# Altium PCB nrf52840_bma250e.PcbDoc
Units mil, origin at the board's own origin, x right, y up, seen from the top; angles counter-clockwise.
Board outline 1106.39 x 1279.63 mil, 2 copper layers (Top Layer, Bottom Layer), stack 12.8 mil thick; 21 components, 59 nets, 119 pads, 88 vias.
Unrouted connection lines stored in the file: 1.
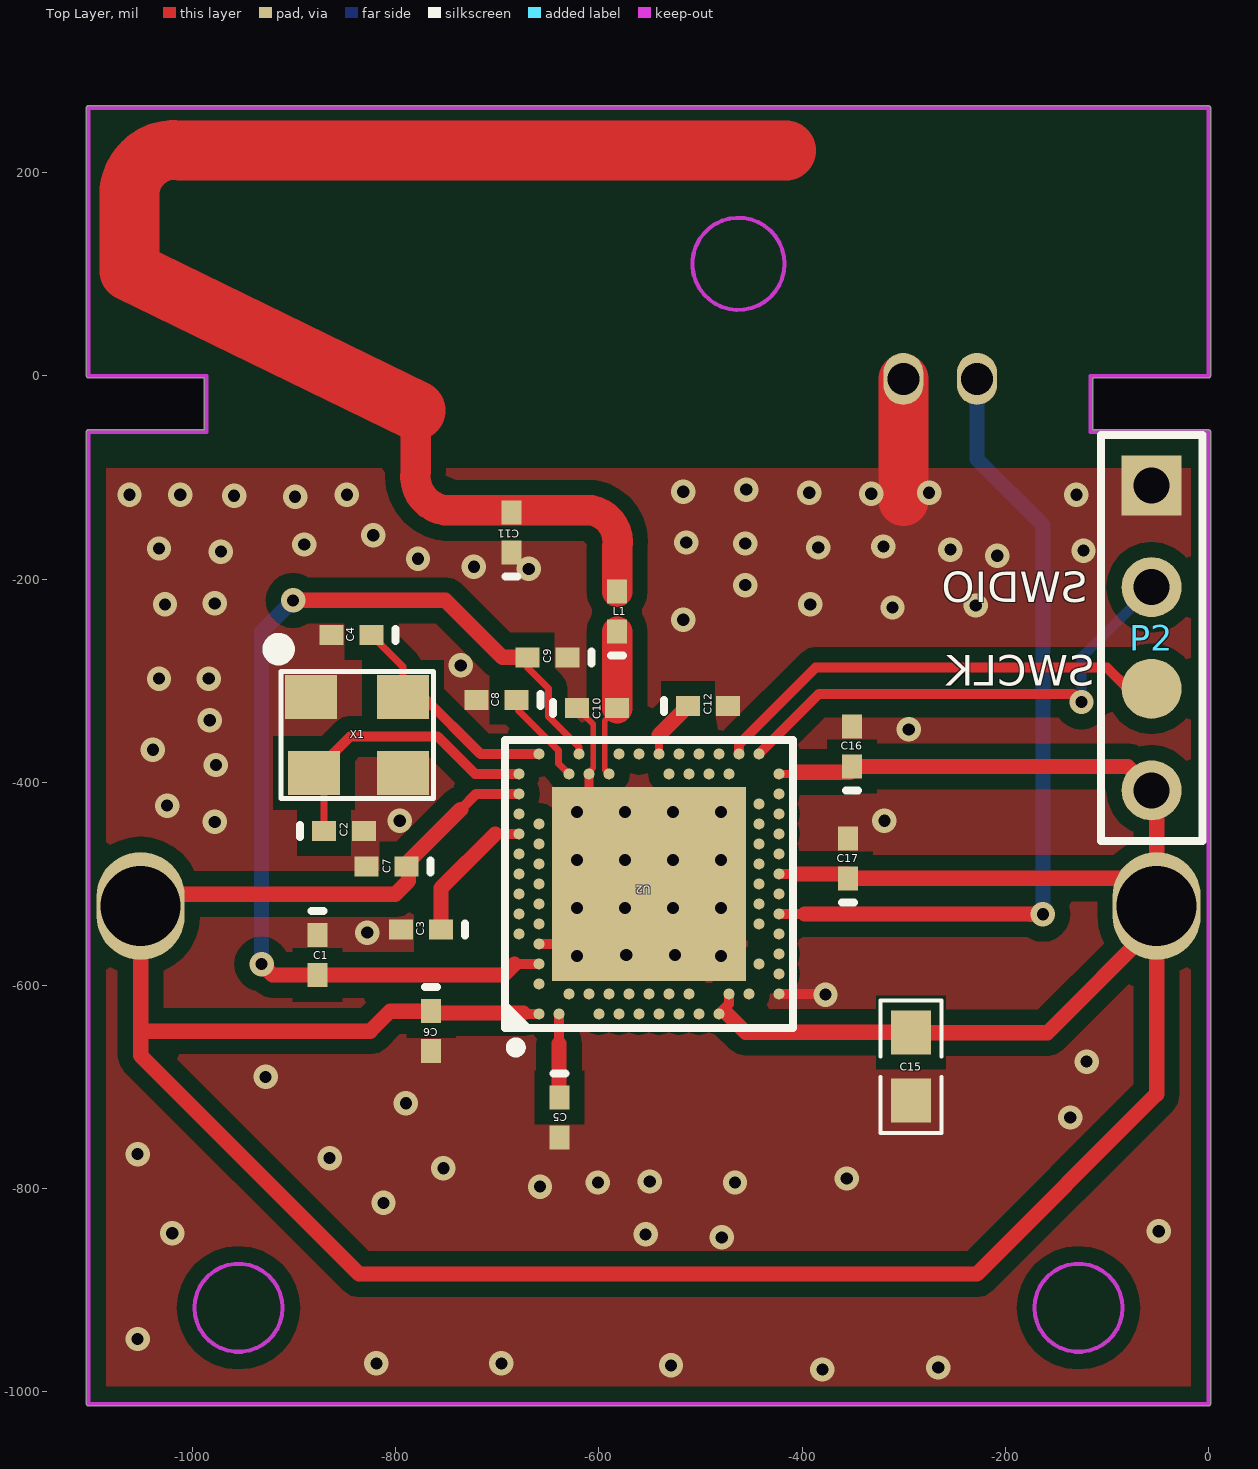
[diagram p0: Top Layer view]
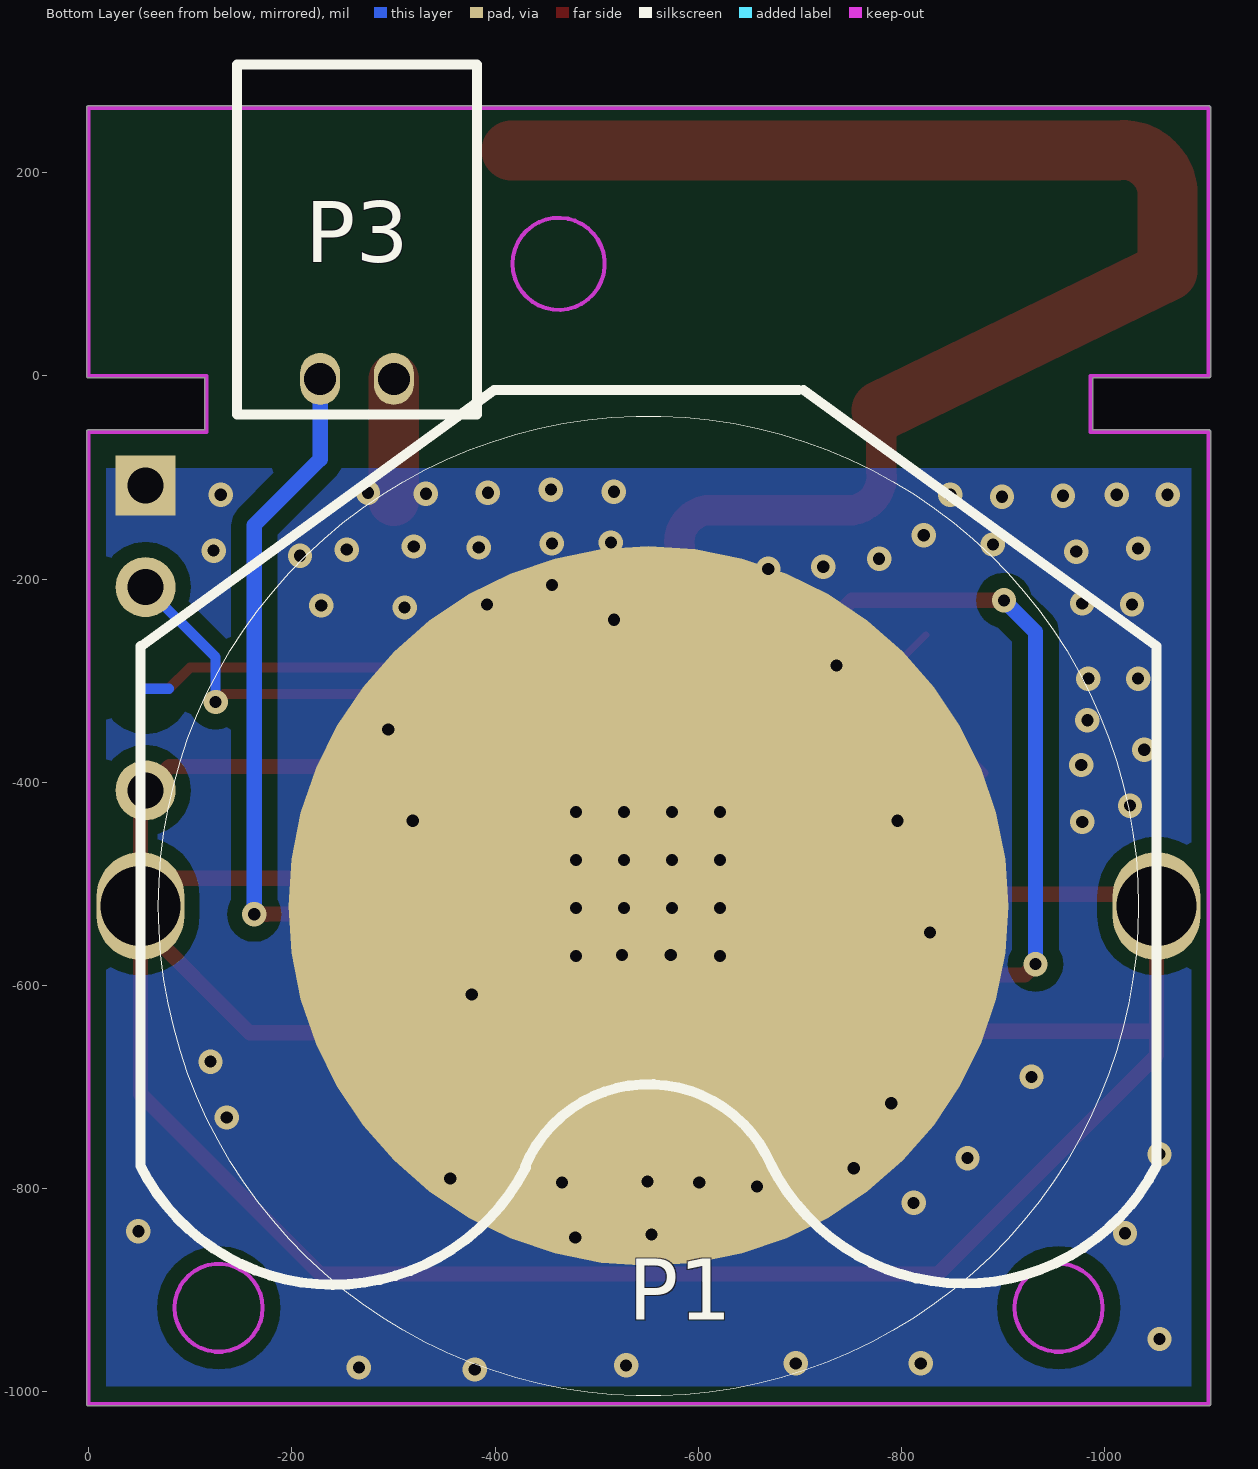
[diagram p1: Bottom Layer view, seen from below]

## Layer stack, top to bottom
Top Layer: signal copper 1.4
Dielectric: core 10, FR-4, Dk 4.2
Bottom Layer: signal copper 1.4

## Board outline
-1104.38,-1011.82 ccw(c-1102.36,-1011.82) -1102.36,-1013.84 0,-1013.84 ccw(c0,-1011.82) 2.02,-1011.82 2.02,-55.12 ccw(c0,-55.12) 0,-53.11 -114.12,-53.11 -114.12,-2.01 0,-2.01 ccw(c0,0) 2.02,0 2.02,263.78 ccw(c0,263.78) 0,265.8 -1102.36,265.8 ccw(c-1102.36,263.78) -1104.38,263.78 -1104.38,0 ccw(c-1102.36,0) -1102.36,-2.01 -988.23,-2.01 -988.23,-53.11 -1102.36,-53.11 ccw(c-1102.36,-55.12) -1104.38,-55.12

## Design rules (kind name [scope] priority, off if disabled: settings)
Clearance [All] p1: gap=5
ComponentClearance [All] p1 off: gap=10 collisioncheckmode=3 verticalgap=10 showdistances=FALSE
Height [All] p1 off: minheight=0 maxheight=1000 prefheight=500
MinimumSolderMaskSliver [All] p1 off: minsoldermaskwidth=10
NetAntennae [All] p1 off: netantennaetolerance=0
PlaneConnect [All] p1: planeconnectstyle=Direct reliefexpansion=20 reliefentries=4 reliefconductorwidth=10 reliefairgap=10
PolygonConnect [All] p1: connectstyle=Direct reliefconductorwidth=10 reliefentries=4 polygonreliefangle="90 Angle"
RoutingVias [All] p1: holewidth=28 width=50 viastyle="Through Hole" minholewidth=28 minwidth=50 maxholewidth=28 maxwidth=50
SilkToSilkClearance [All] p1 off: silktosilkclearance=10
SilkscreenOverComponentPads SilkToSolderMaskClearance [IsPad] p1 off: minsilkscreentomaskgap=10
SolderMaskExpansion [All] p1: expansion=4
Width [All] p1: maxlimit=100 minlimit=1 preferedwidth=10 minimp=50.000000 maximp=50.000000 favimp=50.000000
21 further rules are at their usual default settings.

## Components (designator, comment, footprint, x,y, rotation, side; value= is the part's Value field where it differs from the comment)
C1 "1.0μF" 0402-A -877,-570 r270 top
C2 "12pF" 0402-A -850.69,-448.06 r0 top
C3 "N.C." 0402-A -775,-545 r180 top
C4 "12pF" 0402-A -843.69,-255.06 r180 top
C5 "100nF" 0402-A -639,-730 r270 top
C6 "1.0μF" 0402-A -765,-645 r270 top
C7 "100nF" 0402-A -809,-482.82 r180 top
C8 "100pF" 0402-A -701,-318.82 r180 top
C9 "N.C." 0402-A -650.69,-277.06 r180 top
C10 "0.75pF" 0402-A -601.69,-327.06 r0 top
C11 "NC" 0402-A -686,-154 r90 top
C12 "820pF" 0402-A -492.69,-325.06 r0 top
C15 "4.7μF" 0603-1 -293,-680 r270 top
C16 "100nF" 0402-a -351,-364.82 r90 top
C17 "100nF" 0402-a -355,-474.82 r90 top
L1 "1nH" 0402-A -582,-232 r90 top
P1 "Header 3" bat -51,-521.82 r180 bottom
P2 "Header 4" HDR1X4 -56,-108 r270 top
P3 "Header 2" connect_2 -146,-38 r180 bottom
U2 "nRF52840-QIAA" AQFN50P700X700X85_HS-74N -550.69,-500.06 r90 top
X1 "32MHz" SMD3225 -792.69,-316.06 r180 top

## Footprints (in the part's own frame and the unit in brackets; to place one, negate y for a bottom-side part, rotate by r counter-clockwise, add the part's x,y. Pads: shape width x height; smd on the part's side, far side on the other; paste and mask are expansions set on the pad)
0402-A [mm] "Chip Inductor; Body 1 x 0.5 mm (LxW typ"
  rect 0.6x0.5 smd: 1(-0.5,0) 2(0.5,0)
  silkscreen extent -1.1,-0.15 -1.1,0.15
0402-a [mm] "Chip Inductor; Body 1 x 0.5 mm (LxW typ)"
  rect 0.6x0.5 smd: 1(-0.5,0) 2(0.5,0)
  silkscreen extent -1.1,-0.15 -1.1,0.15
0603-1 [mm]
  rect 1.1x1 smd: 1(-0.85,0) 2(0.85,0)
  silkscreen extent -1.65,-0.76 1.65,0.76, body extent -1.14,-0.38 1.14,0.38, height 1
AQFN50P700X700X85_HS-74N [mm]
  rect 4.85x4.85 smd mask+0.05: 74(0,0)
  round 0.275 smd paste+0.012 mask+0.05: A8(-1.25,3.25) A10(-0.75,3.25) A12(-0.25,3.25) A14(0.25,3.25) A16(0.75,3.25) A18(1.25,3.25) A20(1.75,3.25) A22(2.25,3.25) A23(2.75,3.25) AA24(3.25,-2.25) AB2(-2.75,-2.5) AC5(-2,-2.75) AC9(-1,-2.75) AC11(-0.5,-2.75) AC13(0,-2.75) AC15(0.5,-2.75) AC17(1,-2.75) AC19(1.5,-2.75) AC21(2,-2.75) AC24(3.25,-2.75) AD2(-2.75,-3.25) AD4(-2.25,-3.25) AD6(-1.75,-3.25) AD8(-1.25,-3.25) AD10(-0.75,-3.25) AD12(-0.25,-3.25) AD14(0.25,-3.25) AD16(0.75,-3.25) AD18(1.25,-3.25) AD20(1.75,-3.25) AD22(2.25,-3.25) AD23(2.75,-3.25) B1(-3.25,2.75) B3(-2.5,2.75) B5(-2,2.75) B7(-1.5,2.75) B9(-1,2.75) B11(-0.5,2.75) B13(0,2.75) B15(0.5,2.75) B17(1,2.75) B19(1.5,2.75) B24(3.25,2.75) C1(-3.25,2.25) D2(-2.75,2) D23(2.75,2) E24(3.25,1.75) F2(-2.75,1.5) F23(2.75,1.5) G1(-3.25,1.25) H2(-2.75,1) H23(2.75,1) J1(-3.25,0.75) J24(3.25,0.75) K2(-2.75,0.5) L1(-3.25,0.25) L24(3.25,0.25) M2(-2.75,0) N1(-3.25,-0.25) N24(3.25,-0.25) P2(-2.75,-0.5) P23(2.75,-0.5) R1(-3.25,-0.75) R24(3.25,-0.75) T2(-2.75,-1) T23(2.75,-1) U1(-3.25,-1.25) U24(3.25,-1.25) V23(2.75,-1.5) W1(-3.25,-1.75) W24(3.25,-1.75) Y2(-2.75,-2) Y23(2.75,-2)
  silkscreen extent -4.21,-3.6 3.6,3.6, body extent -3.55,-3.55 3.55,3.55, height 0.85
bat [mm]
  oval 2.2x2.7 hole 2: 1(0,0) 2(25.4,0)
  round 18 smd: 3(12.7,0)
  silkscreen extent 0,-12.25 25.4,12.9
connect_2 [mm]
  oval 1x1.3 hole 0.8: 1(2.08,0.889) 2(3.92,0.889)
  silkscreen extent 0,0 6,8.75
HDR1X4 [mm] "Connector; Header; 4 Position"
  rect 1.5x1.5 hole 0.9: 1(0,0)
  round 1.5 hole 0.9: 2(2.54,0) 4(7.62,0)
  round 1.5 smd: 3(5.08,0)
  silkscreen extent -1.27,-1.27 8.89,1.27
SMD3225 [mm]
  rect 1.3x1.1 smd: 1(0,0) 2(2.3,0) 3(2.23,1.9) 4(0,1.9)
  silkscreen extent -0.76,-1.32 3.24,2.54

## Part data
C1 C6: library part C0603-1?, "Capacitor, X7R, ±10%"
C2 C4: library part C0402-12p, "Capacitor, NP0, ±2%"
C3 C9: library part C0402-N.C., "Not mounted"
C5 C7 C16 C17: library part C0402-100n, "Capacitor, X7R, ±10%"
C8: library part C0402-100p, "Capacitor, NP0, ±5%"
C10: library part C0402-0.8p, "Capacitor, NP0, ±10%"
C11: library part C0402-0.5p, "Capacitor, NP0, ±10%"
C12: library part C0402-820p, "Capacitor, NP0, ±5%"
C15: library part C0603-4μ7-6.3V-X, "Capacitor, X7R, ±10"
L1: library part L0402-4n7, "High frequency chip inductor ±5%"
P1: "Header, 3-Pin"
P2: "Header, 4-Pin"
P3: "Header, 2-Pin"
U2: library part nRF52840-QIAAD0, "Multi-protocol Bluetooth Low Energy, IEEE 802.15.4, ANT and 2.4GHz proprietary system-on-chip"
X1: library part XTAL_SMD2016_32MHz_8pF_General, "XTAL SMD 2016, 32MHz, Cl=8pF, Total Tol: ±40ppm"

## Via types
v1: diameter 24, hole 12, Top Layer to Bottom Layer, 88 vias

## Nets (pads, with @x,y where several pads share a name; then routed paths per layer and width w, separated by ;. In a path a pad name is that pad's centre, name@x,y a point inside that pad or via, vN(x,y) a via of type N, cw(c..) or ccw(c..) an arc to the next point about the centre after c; other vN are vias at no path point)
DEC1: C5.1 U2.C1 | length 82.4
  Top Layer w10: -639.27,-657.27 U2.C1
  Top Layer w15: -639.27,-657.27 -639.27,-710.05 C5.1
DEC3: C8.1 U2.D23 | length 94.3
  Top Layer w7: C8.1@-679,-318.06 -679,-329.55 -639.69,-368.87 -639.69,-381.53 U2.D23
DEC4_6: C1.2 C9.2 U2.B5 U2.E24 | length 1022.8
  Top Layer w7: C9.2 -670.37,-287.06 -649.69,-307.74 -649.69,-335.35 -619.58,-365.45 U2.E24
  Top Layer w10: -683,-578.8 U2.B5
  Top Layer w15: v1(-932,-579) -921.31,-589.69 C1.2 -693.89,-589.69 -683,-578.8 ; v1(-901,-221) -751,-221 -694.94,-277.06 C9.2
  Bottom Layer w15: v1(-932,-579) -932,-252 v1(-901,-221)
GND: C1.1 C2.2 C3.2 C4.2 C5.2 C6.2 C7.2 C8.2 C9.1 C10.1 C11.1 C12.2 C15.2 C16.2 C17.2 P1.3 P2.1 P3.2 U2.74 U2.AD2 U2.B7 U2.F23 X1.2 X1.4 | length 337.7
  Top Layer w5.71: C10.1 -605.61,-342.82 -605.61,-386.06 -609.74,-390.19 U2.F23
  Top Layer w9: U2.74@-609.74,-441 U2.F23
  Top Layer w10: U2.B7 U2.74@-609.74,-559.11 ; U2.AD2 -377.68,-608.32 v1(-377,-609)
  Top Layer w49.37: -300.33,-123.33 -300.33,-115 P3.2
  other v1: -380,-978 -266,-976 -529,-974 -819,-972 -696,-972 -1054,-948 -479,-848 -554,-845 -1020,-844 -49,-842 -812,-814 -658,-798 -601,-794 -466,-794 -550,-793 -356,-790 -753,-780 -865,-770 -1054,-766 -136,-730 -790,-716 -928,-690 -120,-675 -621.55,-570.92 -479.82,-570.92 -573,-570 -525,-570 -828,-548 -621.55,-523.68 -574.31,-523.68 -527.06,-523.68 -479.82,-523.68 -621.55,-476.43 -574.31,-476.43 -527.06,-476.43 -479.82,-476.43 -978,-439 -796,-438 -319,-437.82 -621.55,-429.19 -574.31,-429.19 -527.06,-429.19 -479.82,-429.19 -1025,-423 -977,-383 -1039,-368 -295,-348 -983,-339 -1033,-298 -984,-298 -736,-285 -517,-240 -311,-228 -229,-226 -1027,-225 -392,-225 -978,-224 -456,-206 -669,-190 -723,-188 -778,-180 -208,-177 -972,-173 -123,-172 -254,-171 -1033,-170 -384,-169 -320,-168 -890,-166 -456,-165 -514,-164 -822,-157 -899,-119 -959,-118 -1062,-117 -1012,-117 -848,-117 -130,-117 -332,-116 -393,-115 -275,-115 -517,-114 -455,-112
NetC3_1: C3.1 U2.A18 | length 139.6
  Top Layer w10: -702.02,-450.84 U2.A18
  Top Layer w15: C3.1 -755.31,-504.13 -702.02,-450.84
NetC10_2: C10.2 L1.1 U2.H23 | length 146.9
  Top Layer w5.71: U2.H23 -594.19,-387.65 -594.19,-339.25 C10.2
  Top Layer w30: C10.2 L1.1
NetC12_1: C12.1 U2.N24 | length 58.8
  Top Layer w8: U2.N24 -540.84,-353.53
  Top Layer w15: -540.84,-353.53 C12.1
P0.02/AIN0: U2.A12
P0.03/AIN1: U2.B13
P0.04/AIN2: U2.J1
P0.05/AIN3: U2.K2
P0.06: U2.L1
P0.07: U2.M2
P0.08: U2.N1
P0.09/NFC1: U2.L24
P0.10/NFC2: U2.J24
P0.11: U2.T2
P0.12: U2.U1
P0.13: U2.AD8
P0.14: U2.AC9
P0.15: P3.1 U2.AD10 | length 813.8
  Top Layer w10: U2.AD10 -397.42,-529.58
  Top Layer w15: -397.42,-529.58 -175.42,-529.58 -175,-530 v1(-163,-530)
  Bottom Layer w15: P3.1 -227.89,-82.11 -163,-147 v1(-163,-530)
P0.16: U2.AC11
P0.17: U2.AD12
P0.18/RESET: U2.AC13
P0.19: U2.AC15
P0.20: U2.AD16
P0.21: U2.AC17
P0.22: U2.AD18
P0.23: U2.AC19
P0.24: U2.AD20
P0.25: U2.AC21
P0.26: U2.G1
P0.27: U2.H2
P0.28/AIN4: U2.B11
P0.29/AIN5: U2.A10
P0.30/AIN6: U2.B9
P0.31/AIN7: U2.A8
P1.00: U2.AD22
P1.01: U2.Y23
P1.02: U2.W24
P1.03: U2.V23
P1.04: U2.U24
P1.05: U2.T23
P1.06: U2.R24
P1.07: U2.P23
P1.08: U2.P2
P1.09: U2.R1
P1.10: U2.A20
P1.11: U2.B19
P1.12: U2.B17
P1.13: U2.A16
P1.14: U2.B15
P1.15: U2.A14
RF: C11.2 L1.2 | length 1409.8
  Top Layer w30: -780.25,-34 -780.25,-93.75 ccw(c-746.68,-98.75) -751.69,-132.31 -723,-132.31 -607.69,-132.31 cw(c-613.19,-163.5) -582,-169 L1.2
  Top Layer w59.01: -1062,183 cw(c-1017.5,177.5) -1012,222 -416,222
  Top Layer w59.06: -1062,183 -1062,103 -780.25,-34
SWDCLK: P2.3 U2.AA24 | length 478.7
  Top Layer w10: U2.AA24 -462.1,-362.47 -386.63,-287 -100,-287 -79,-308 P2.3
  Bottom Layer w10: -79,-308 -56,-308
SWDIO: P2.2 U2.AC24 | length 486.8
  Top Layer w10: U2.AC24 -383.31,-313 -133,-313 v1(-125,-321)
  Bottom Layer w10: v1(-125,-321) -125,-277 P2.2
VDD_NRF: C6.1 C7.1 C15.1 C16.1 C17.1 P1.1 P1.2 P2.4 U2.A22 U2.AD14 U2.AD23 U2.B1 U2.W1 U2.Y2 | length 3704.5
  Top Layer w8: U2.AD23 -402.95,-391.79
  Top Layer w10: -736,-426.82 -720.65,-411.47 U2.A22 ; -674.22,-627.06 -673.27,-628.01 U2.B1 ; U2.W1 -471.94,-618.17 U2.Y2 ; U2.AD14 -406.69,-490.21 ; C17.1 -354.68,-494.82 C17.1@-348.68,-494.82 ; C16.1@-353.15,-390.06 C16.1@-351.91,-388.82
  Top Layer w15: C6.1@-765,-627.06 -674.22,-627.06 ; C6.1 -805.31,-625.32 -825,-645 -1051,-645 ; -736,-426.82 -787.31,-478.13 -787.31,-497.13 -800.34,-510.16 -1039.34,-510.16 P1.2 -1051,-645 ; -473.69,-628.06 -455.69,-646.06 -293.48,-646.06 C15.1 -158.54,-646.54 P1.1@-51,-539 ; -406.69,-490.21 C17.1@-355.16,-490.21 ; -402.95,-390.06 C16.1@-353.15,-390.06 ; C17.1 -78.31,-494.51 P1.1 ; C16.1 -79.49,-384.51 P2.4 -51,-413 P1.1 ; -1051,-645 -1051,-669 -836,-884 -228,-884 -51,-707 P1.1@-51,-539 ; P1.1@-51,-539 P1.1
XC1: C4.1 U2.B24 X1.1 | length 230.9
  Top Layer w7: C4.1 -792.69,-286.37 X1.1
  Top Layer w10: X1.1 -772.69,-316.06 -716.64,-372.1 U2.B24
XC2: C2.1 U2.A23 X1.3 | length 293.3
  Top Layer w7: X1.3 -870.37,-400.97 C2.1
  Top Layer w10: X1.3 -844.68,-355.06 -758.69,-355.06 -721.95,-391.79 U2.A23
pads on no net: U2.AB2 U2.AC5 U2.AD4 U2.AD6 U2.B3 U2.D2 U2.F2

## Polygon pours and split planes (outlines as drawn)
GND on Top Layer "Bottom Layer-No Net 1" (solid, remove dead copper, pour order 4): -1120,-91 204,-91 204,-907 72,-1039 62,-1049 -1113,-1049
GND on Bottom Layer "Bottom Layer-No Net 1" (solid, remove dead copper, pour order 6): -1119,-91 78,-91 89,-102 80,-111 80,-1088 -1127,-1088 -1177,-1038

## Keep-outs
Keep-Out Layer:
  circle w4.02: c-462.6,110.23 r45.33
  circle w4.02: c-127.95,-917.33 r43.35
  circle w4.02: c-954.72,-917.33 r43.35
  lines w4: -1102.36,-1011.82 0,-1011.82 ; -1102.36,-1011.82 -1102.36,-55.12 ; -1102.36,-1011.82 -1102.36,-55.12 ; -1102.36,-1011.82 0,-1011.82 ; -1102.36,-55.12 -986.22,-55.12 ; -1102.36,-55.12 -986.22,-55.12 ; -1102.36,0 -986.22,0 ; -1102.36,0 -1102.36,263.78 ; -1102.36,0 -1102.36,263.78 ; -1102.36,0 -986.22,0 ; -1102.36,263.78 0,263.78 ; -1102.36,263.78 0,263.78 ; -986.22,-55.12 -986.22,0 ; -986.22,-55.12 -986.22,0 ; -116.14,-55.12 0,-55.12 ; -116.14,-55.12 -116.14,0 ; -116.14,-55.12 0,-55.12 ; -116.14,-55.12 -116.14,0 ; -116.14,0 0,0 ; -116.14,0 0,0 ; 0,-1011.82 0,-55.12 ; 0,-1011.82 0,-55.12 ; 0,0 0,263.78 ; 0,0 0,263.78

## Silkscreen, mask and mechanical layers (free items; w line width, h text height)
Top Overlay:
  text "SWDIO" at -119,-223 h30
  text "SWCLK" at -112,-305 h30
Top Solder:
  rectangle: -1102.36,-85 -349,263.78
Bottom Solder:
  rectangle: -1102.36,-85 -382,263.78